# Altium PCB Sample_Holder_DC_Small.PcbDoc
Units mm, origin at the board's own origin, x right, y up, seen from the top; angles counter-clockwise.
Board outline 25.4 x 80 mm, 2 copper layers (Top Layer, Bottom Layer); 2 components, 26 nets, 57 pads, 0 vias.
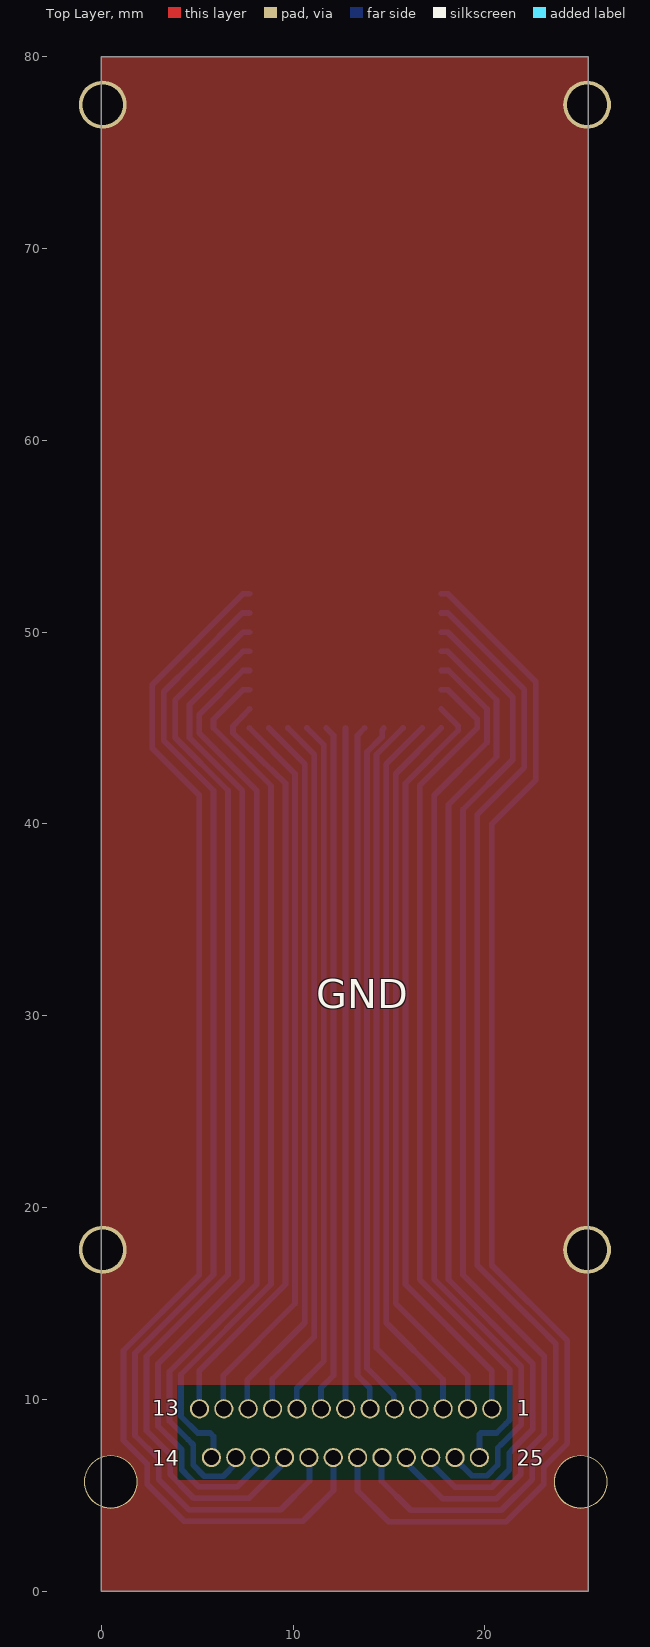
[diagram p0: Top Layer view]
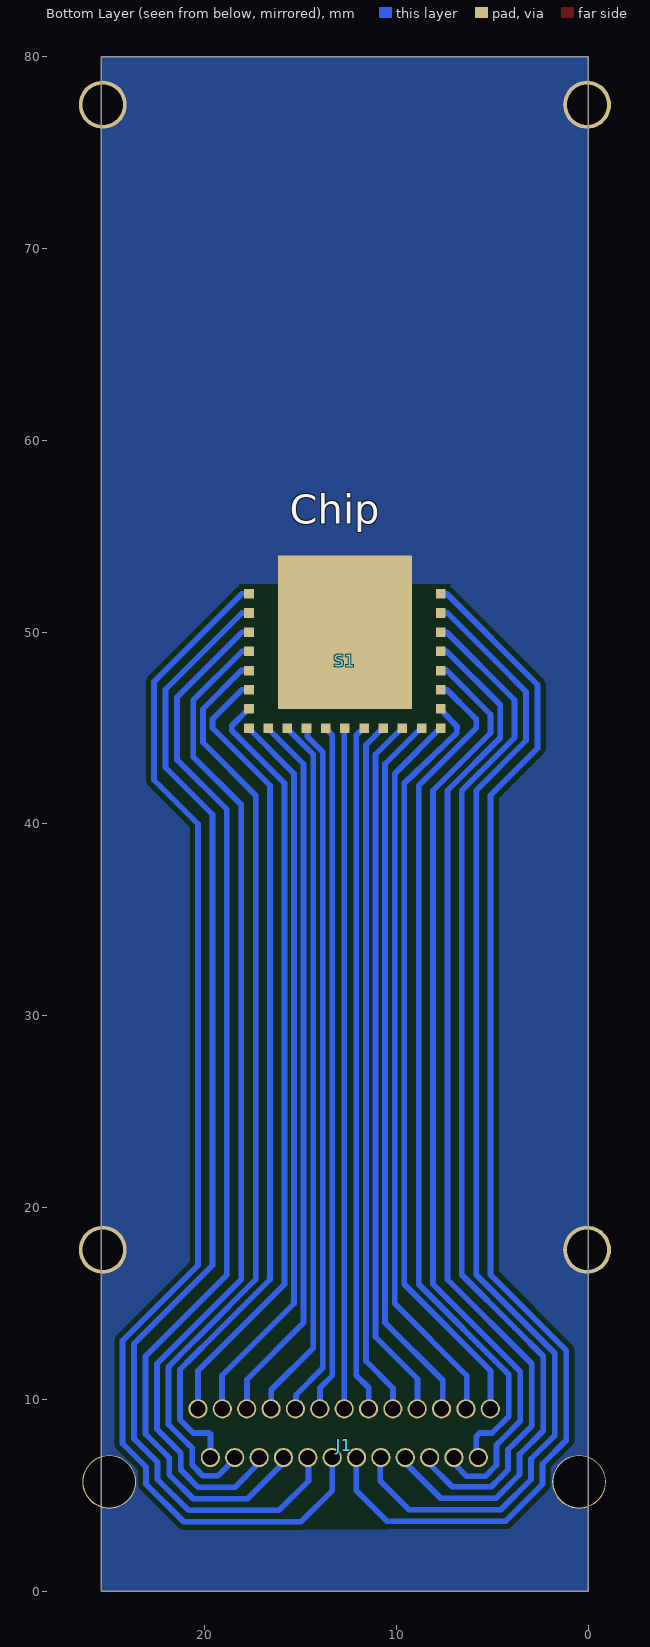
[diagram p1: Bottom Layer view, seen from below]

## Layer stack, top to bottom
Top Solder: solder mask 0.0102, Solder Resist, Dk 3.5
Top Layer: signal copper 0.0356
Dielectric 1: dielectric 0.32, FR-4, Dk 4.8
Bottom Layer: signal copper 0.0356
Bottom Solder: solder mask 0.0102, Solder Resist, Dk 3.5

## Board outline
0,0 25.4,0 25.4,80 0,80

## Design rules (kind name [scope] priority, off if disabled: settings)
Clearance [All] p1: gap=0.254 ignorepadtopadclearanceinfootprint=FALSE except(0: Arc-Hole Track-Hole SMDPad-Hole THPad-Hole Via-Hole Fill-Hole Poly-Hole Region-Hole Text-Hole; 0.127: Arc-Arc Arc-Track Arc-SMDPad Track-Track Track-SMDPad SMDPad-SMDPad)
PolygonConnect PolygonConnect_GND [InNet('GND') vs InNet('GND')] p1: connectstyle=Direct reliefconductorwidth=0.254 reliefentries=4 polygonreliefangle="90 Angle" airgapwidth=0.254
PolygonConnect [All] p2: connectstyle=Relief reliefconductorwidth=0.254 reliefentries=4 polygonreliefangle="90 Angle" airgapwidth=0.254
RoutingVias [All] p1: holewidth=0.711 width=1.27 viastyle="Through Hole" minholewidth=0.711 minwidth=1.27 maxholewidth=0.711 maxwidth=1.27
SolderMaskExpansion [All] p1: expansion=0.102 istentingtop=FALSE
Width [All] p1: maxlimit=0.3 minlimit=0.3 preferedwidth=0.3
30 further rules are at their usual default settings.

## Components (designator, comment, footprint, x,y, rotation, side; value= is the part's Value field where it differs from the comment)
J1 "MICRO_DSUB_25" 581-M25-113L461 12.74,9.51 r180 bottom locked
S1 "Sample_1" Sample_1 12.7,50 r180 bottom locked

## Footprints (in the part's own frame and the unit in brackets; to place one, negate y for a bottom-side part, rotate by r counter-clockwise, add the part's x,y. Pads: shape width x height; smd on the part's side, far side on the other; paste and mask are expansions set on the pad)
581-M25-113L461 [mm] "CONN MICRO-D MALE 25P RA"
  round 1 hole 0.8: 1(-7.62,0) 2(-6.35,0) 3(-5.08,0) 4(-3.81,0) 5(-2.54,0) 6(-1.27,0) 7(0,0) 8(1.27,0) 9(2.54,0) 10(3.81,0) 11(5.08,0) 12(6.35,0) 13(7.62,0) 14(6.997,-2.54) 15(5.727,-2.54) 16(4.457,-2.54) 17(3.187,-2.54) 18(1.917,-2.54) 19(0.647,-2.54) 20(-0.623,-2.54) 21(-1.893,-2.54) 22(-3.163,-2.54) 23(-4.433,-2.54) 24(-5.703,-2.54) 25(-6.973,-2.54)
  round 2.8 hole 2.69: M1(-12.25,-3.81) M2(12.25,-3.81)
  body extent -15.07,-14.19 15.03,0.88, height 7.9
Sample_1 [mm]
  rect 0.5x0.5 smd: 1(-5,-4) 2(-5,-5) 3(-4,-5) 4(-3,-5) 5(-2,-5) 6(-1,-5) 7(0,-5) 8(1,-5) 9(2,-5) 10(3,-5) 11(4,-5) 12(5,-5) 13(5,-4) 14(5,-3) 15(5,-2) 16(5,-1) 17(5,0) 18(5,1) 19(5,2) 20(-5,2) 21(-5,1) 22(-5,0) 23(-5,-1) 24(-5,-2) 25(-5,-3)
  rect 7x8 smd: 26(0,0)

## Part data
J1: "Micro D-Sub 25 pin connector"

## Free pads (board coordinates)
  round 2.5 hole 2.1: ""(0.075,17.8) ""(0.075,77.5) ""(25.325,17.8) ""(25.325,77.5)

## Nets (pads, with @x,y where several pads share a name; then routed paths per layer and width w, separated by ;. In a path a pad name is that pad's centre, name@x,y a point inside that pad or via, vN(x,y) a via of type N, cw(c..) or ccw(c..) an arc to the next point about the centre after c; other vN are vias at no path point)
1: J1.1 S1.1 | length 39.9
  Bottom Layer w0.3: S1.1@17.728,46 18.603,45.125 18.603,44.875 15.853,42.125 15.853,16 20.353,11.5 J1.1@20.353,9.51
2: J1.2 S1.2 | length 38
  Bottom Layer w0.3: S1.2@17.728,45 15.353,42.625 15.353,15 19.103,11.25 J1.2@19.103,9.51
3: J1.3 S1.3 | length 37.6
  Bottom Layer w0.3: S1.3@16.728,45 14.853,43.125 14.853,14 17.808,11.045 J1.3@17.808,9.368
4: J1.4 S1.4 | length 37
  Bottom Layer w0.3: S1.4@15.728,45 14.353,43.625 14.353,12.684 16.538,10.499 J1.4@16.538,9.51
5: J1.5 S1.5 | length 36.4
  Bottom Layer w0.3: S1.5@14.728,45 14.728,44.981 14.648,44.9 14.648,44.545 13.853,43.75 13.853,41.985 13.853,39.455 13.853,35.565 13.853,20.195 13.853,16.305 13.853,13.775 13.853,11.635 15.251,10.237 15.251,9.527 J1.5@15.268,9.51
6: J1.6 S1.6 | length 35.9
  Bottom Layer w0.3: S1.6@13.728,45 13.353,44.625 13.353,42.5 13.353,38.875 13.353,36.125 13.353,19.75 13.353,11.25 13.998,10.605 J1.6@13.998,9.51
7: J1.7 S1.7 | length 35.5
  Bottom Layer w0.3: J1.7@12.728,9.51 S1.7@12.728,45
8: J1.8 S1.8 | length 35.9
  Bottom Layer w0.3: J1.8@11.458,9.51 11.458,10.605 12.103,11.25 12.103,19.782 12.103,36.094 12.103,44.625 S1.8@11.728,45
9: J1.9 S1.9 | length 36.4
  Bottom Layer w0.3: J1.9@10.188,9.51 10.188,10.585 11.603,12 11.603,44.125 S1.9@10.728,45
10: J1.10 S1.10 | length 37
  Bottom Layer w0.3: J1.10@8.918,9.51 8.918,11.065 11.103,13.25 11.103,43.625 S1.10@9.728,45
11: J1.11 S1.11 | length 37.5
  Bottom Layer w0.3: J1.11@7.603,9.51 7.603,11 10.603,14 10.603,43.125 S1.11@8.728,45
12: J1.12 S1.12 | length 38
  Bottom Layer w0.3: J1.12@6.353,9.51 6.353,11.25 10.103,15 10.103,42.625 S1.12@7.728,45
13: J1.13 S1.13 | length 39.9
  Bottom Layer w0.3: J1.13@5.103,9.51 5.103,11.5 9.603,16 9.603,42.125 6.869,44.745 6.862,45.096 S1.13@7.728,46
14: J1.14 S1.14 | length 45.3
  Bottom Layer w0.3: J1.14 5.853,7.08 5.853,8.075 5.678,8.25 5.025,8.25 4.158,9.117 4.158,11.305 8.853,16 8.853,42 5.853,45 5.853,45.462 5.998,45.606 7.392,47 S1.14@7.728,47
15: J1.15 S1.15 | length 49.4
  Bottom Layer w0.3: J1.15 7.013,6.66 6.353,6 5.37,6 4.793,6.577 4.793,6.75 4.793,7.633 4.515,7.912 3.558,8.868 3.558,10 3.558,11.455 8.103,16 8.103,41.75 5.103,44.75 5.103,45.712 7.392,48 S1.15@7.728,48
16: J1.16 S1.16 | length 52.9
  Bottom Layer w0.3: S1.16@7.728,49 7.392,49 4.603,46.212 4.603,44.5 7.353,41.75 7.353,16.25 2.958,11.855 2.958,8.62 3.966,7.613 4.193,7.385 4.193,6.328 4.562,5.959 5.071,5.451 7.103,5.451 8.283,6.631 J1.16
17: J1.17 S1.17 | length 56.6
  Bottom Layer w0.3: S1.17@7.728,50 7.392,50 3.853,46.462 3.853,45.25 3.853,44.5 6.603,41.75 6.603,16.5 3.853,13.75 2.358,12.255 2.358,8.371 3.541,7.188 3.593,7.136 3.593,6.08 4.638,5.035 4.822,4.851 7.704,4.851 9.553,6.7 J1.17
18: J1.18 S1.18 | length 60.9
  Bottom Layer w0.3: S1.18@7.728,51 7.353,51 4.853,48.5 3.253,46.9 3.253,46.5 3.253,44.35 5.853,41.75 5.853,16.5 1.758,12.405 1.758,9.5 1.758,8.123 2.992,6.889 2.993,6.888 2.993,5.831 4.574,4.25 7.853,4.25 9.353,4.25 10.853,5.75 J1.18@10.853,6.97
19: J1.19 S1.19 | length 64.8
  Bottom Layer w0.3: S1.19@7.728,52 7.392,52 2.653,47.262 2.653,43.95 5.103,41.5 5.103,16.5 1.158,12.555 1.158,8 1.158,7.874 2.393,6.639 2.393,5.583 4.326,3.65 10.503,3.65 10.603,3.75 12.103,5.25 J1.19@12.103,6.97
20: J1.20 S1.20 | length 64.7
  Bottom Layer w0.3: J1.20@13.353,6.97 13.353,5.25 14.983,3.62 21.101,3.62 23.063,5.583 23.063,6.468 23.225,6.629 24.298,7.703 24.298,11.5 24.298,13.055 20.353,17 20.353,40 22.653,42.3 22.653,44.75 22.653,47.412 18.065,52 S1.20@17.728,52
21: J1.21 S1.21 | length 60.8
  Bottom Layer w0.3: J1.21@14.603,6.97 14.603,5.75 16.133,4.22 20.852,4.22 22.463,5.831 22.463,6.716 22.55,6.803 23.698,7.951 23.698,9 23.698,12.905 22.853,13.75 22.053,14.55 19.603,17 19.603,40.5 22.053,42.95 22.053,45.25 22.053,47.012 18.065,51 S1.21@17.728,51
22: J1.22 S1.22 | length 56.5
  Bottom Layer w0.3: J1.22 15.903,6.7 17.783,4.82 20.604,4.82 21.863,6.08 21.863,6.965 22.001,7.103 23.098,8.2 23.098,12.255 18.853,16.5 18.853,40.75 21.453,43.35 21.453,46.612 18.065,50 S1.22@17.728,50
23: J1.23 S1.23 | length 52.7
  Bottom Layer w0.3: J1.23 17.173,6.68 18.433,5.42 20.355,5.42 21.263,6.328 21.263,6.75 21.263,7.213 21.452,7.402 22.498,8.448 22.498,11.855 18.103,16.25 18.103,41 20.603,43.5 20.603,46.462 18.065,49 S1.23@17.728,49
24: J1.24 S1.24 | length 49
  Bottom Layer w0.3: S1.24@17.728,48 18.103,48 20.103,46 20.103,44.25 17.353,41.5 17.353,16.25 20.103,13.5 20.9,12.703 21.898,11.705 21.898,9.5 21.898,8.697 20.852,7.65 20.839,7.65 20.663,7.475 20.663,6.577 20.107,6.02 19.32,6.02 J1.24@18.407,6.934
25: J1.25 S1.25 | length 45.3
  Bottom Layer w0.3: S1.25@17.728,47 18.065,47 19.603,45.462 19.603,45 16.603,42 16.603,27.875 16.603,22.125 16.603,16.25 19.603,13.25 20.607,12.246 21.298,11.555 21.298,8.945 21.103,8.75 20.603,8.25 19.853,8.25 19.779,8.25 19.713,8.185 J1.25
GND: J1.M1 J1.M2 pad. S1.26

## Polygon pours and split planes (outlines as drawn)
no net on Top Solder "NONET_L-01_P-001" (solid): 0,80 25.4,80 25.4,0 0,0
no net on Bottom Solder "NONET_L-01_P-001" (solid): 0,80 25.4,80 25.4,0 0,0
GND on Bottom Layer "GND_L02_P002" (solid, remove dead copper, pour order 2): 0,80 25.4,80 25.4,0 0,0
GND on Top Layer "GND_L01_P001" (solid, remove dead copper, pour order 1): 0,80 25.4,80 25.4,0 0,0

## Other copper
Top Layer:
  pour cut-out: 3.98,10.73 21.42,10.73 21.42,5.81 3.98,5.81
Bottom Layer:
  pour cut-out: 10.475,3.238 14.925,3.238 14.95,3.213 14.95,7.75 10.475,7.75 10.475,7.725
  pour cut-out: 7.95,52.51 17.45,52.51 17.45,45.25 7.95,45.25

## Silkscreen, mask and mechanical layers (free items; w line width, h text height)
Top Overlay:
  text "GND" at 11.204,30.404 h1.52
  text "13" at 2.65,9.15 h0.8
  text "1" at 21.65,9.15 h0.8
  text "14" at 2.65,6.55 h0.8
  text "25" at 21.65,6.55 h0.8
Bottom Overlay:
  text "Chip" at 15.586,55.662 h1.52
Top Solder:
  pour cut-out: 0,11.1 25.4,11.1 25.4,0 0,0
Bottom Solder:
  pour cut-out: 0,11.1 25.4,11.1 25.4,0 0,0
Mechanical 1:
  the board outline again, w0.05